# Altium PCB Optocoupler.PcbDoc
Units mil, origin at the board's own origin, x right, y up, seen from the top; angles counter-clockwise.
Board outline 1600.03 x 1010.03 mil, 2 copper layers (Top Layer, Bottom Layer); 8 components, 8 nets, 22 pads, 0 vias.
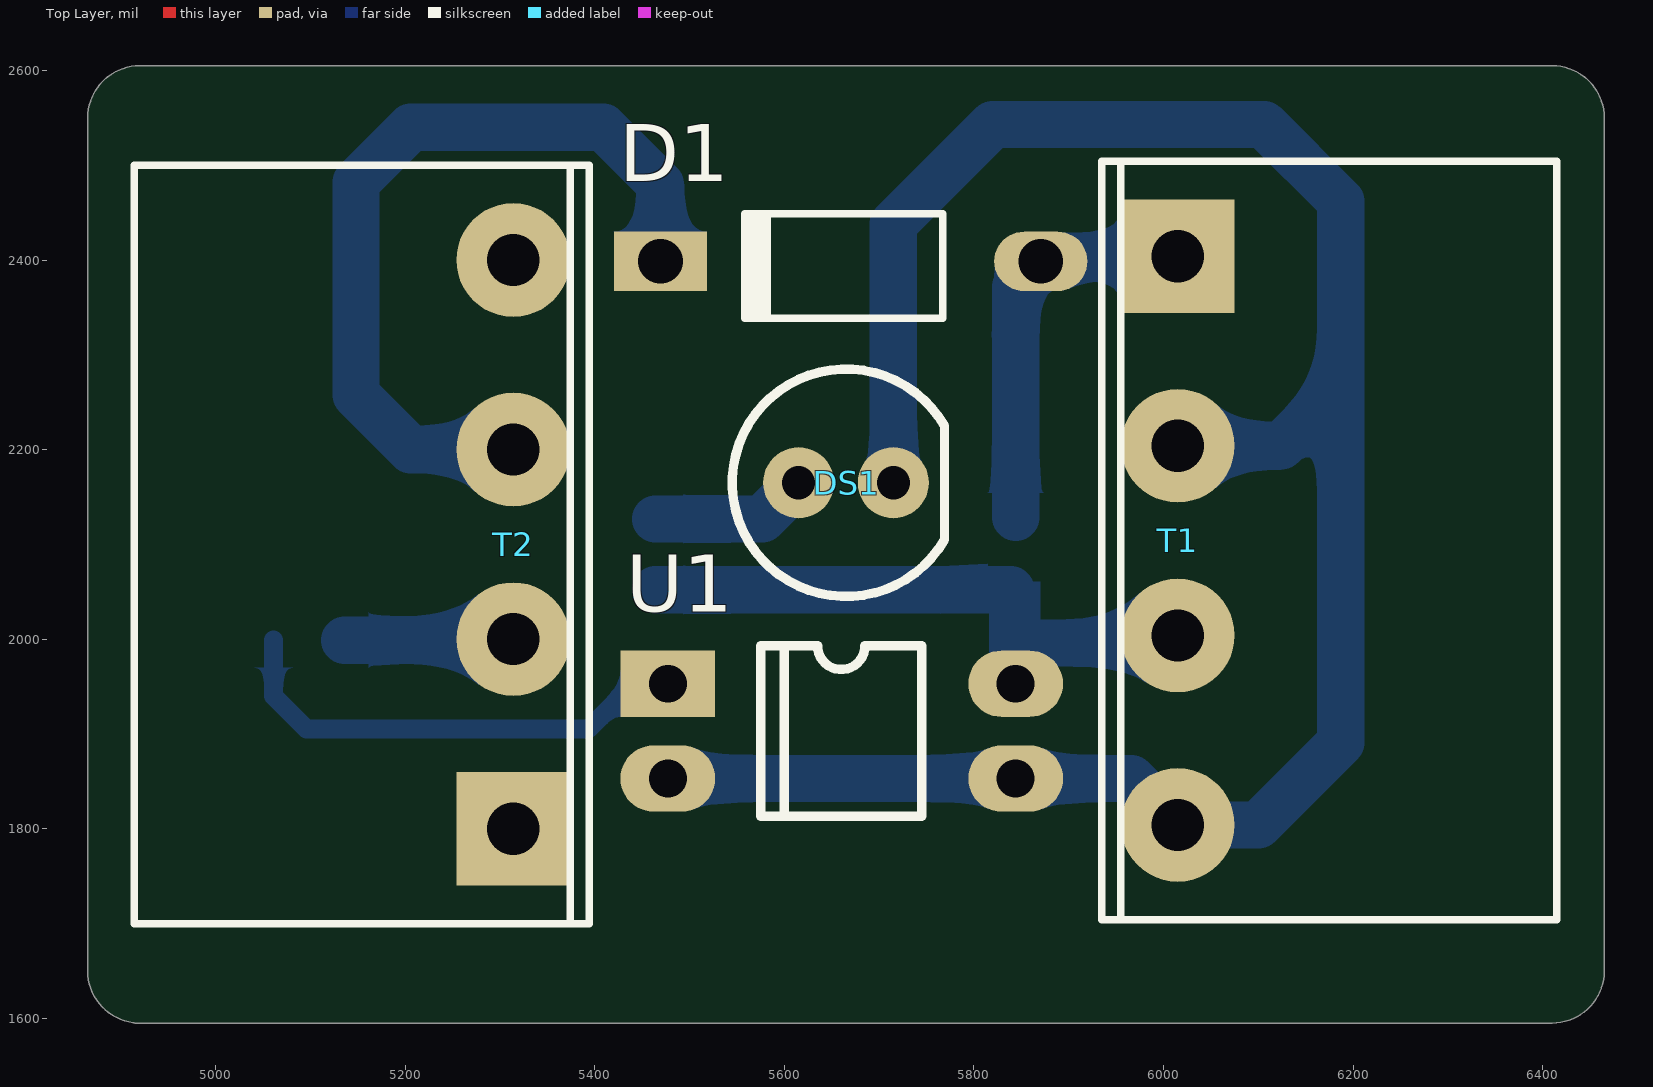
[diagram p0: Top Layer view]
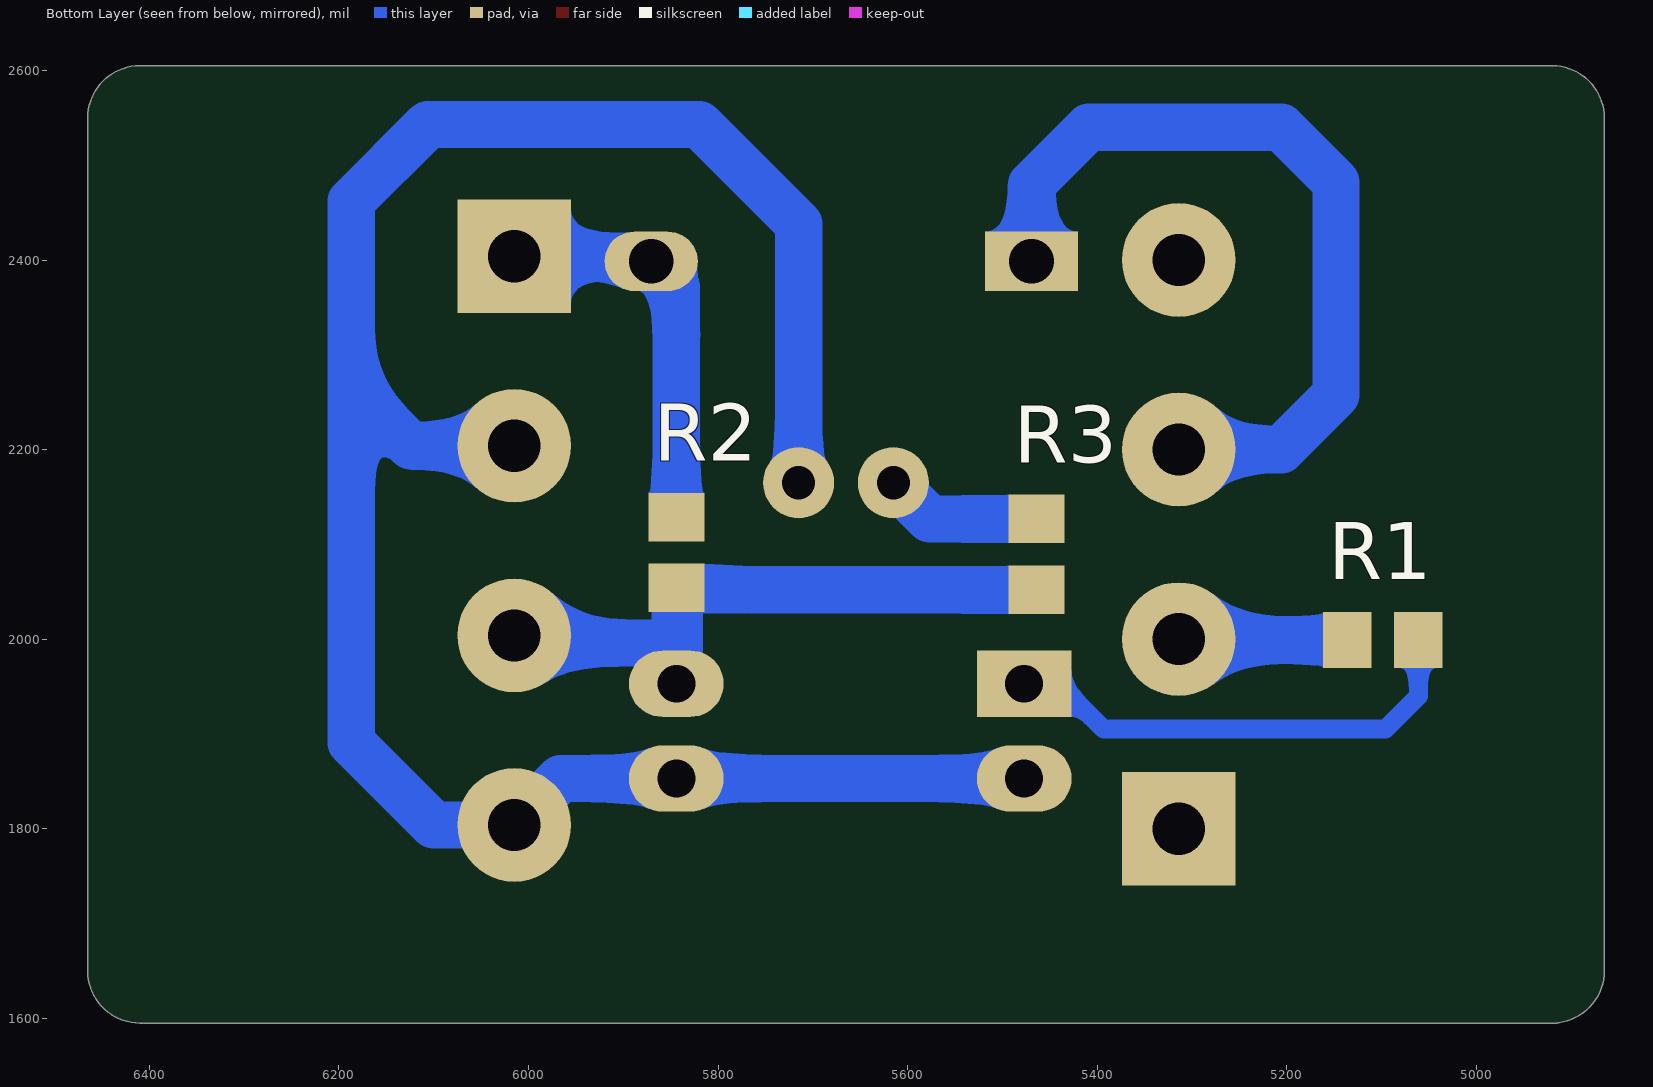
[diagram p1: Bottom Layer view, seen from below]
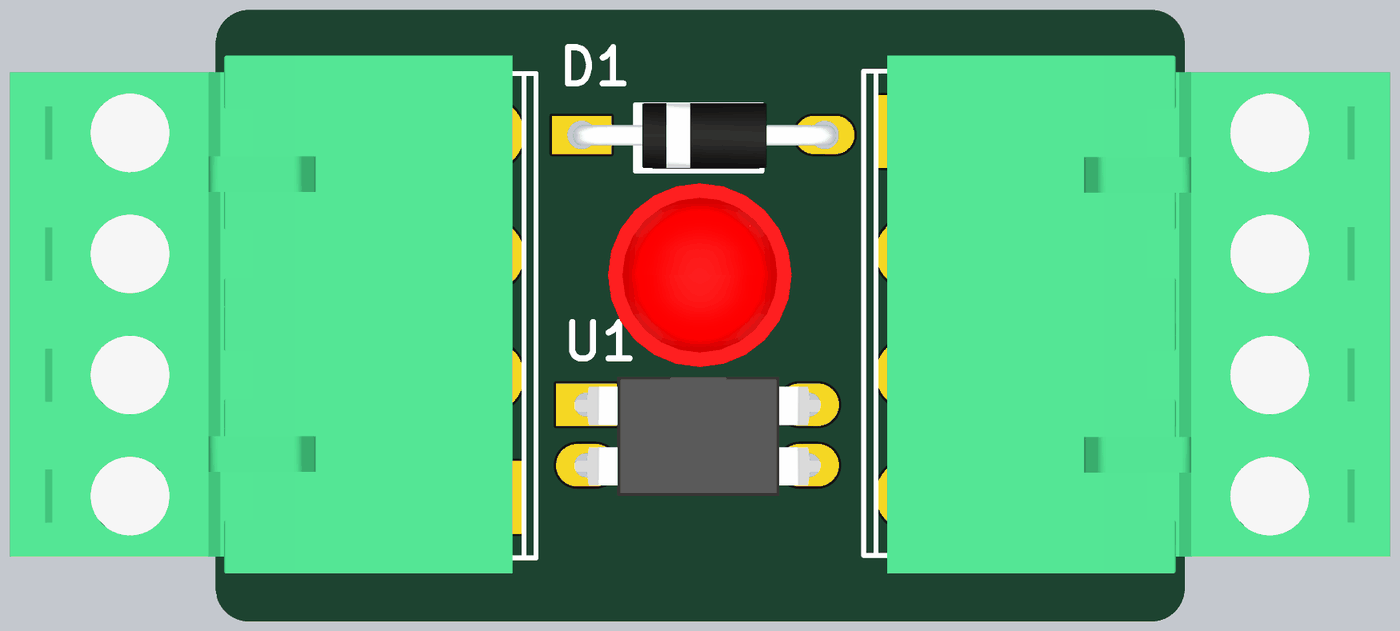
[diagram p2: 3D render of the assembled board from above, using the file's embedded part models]
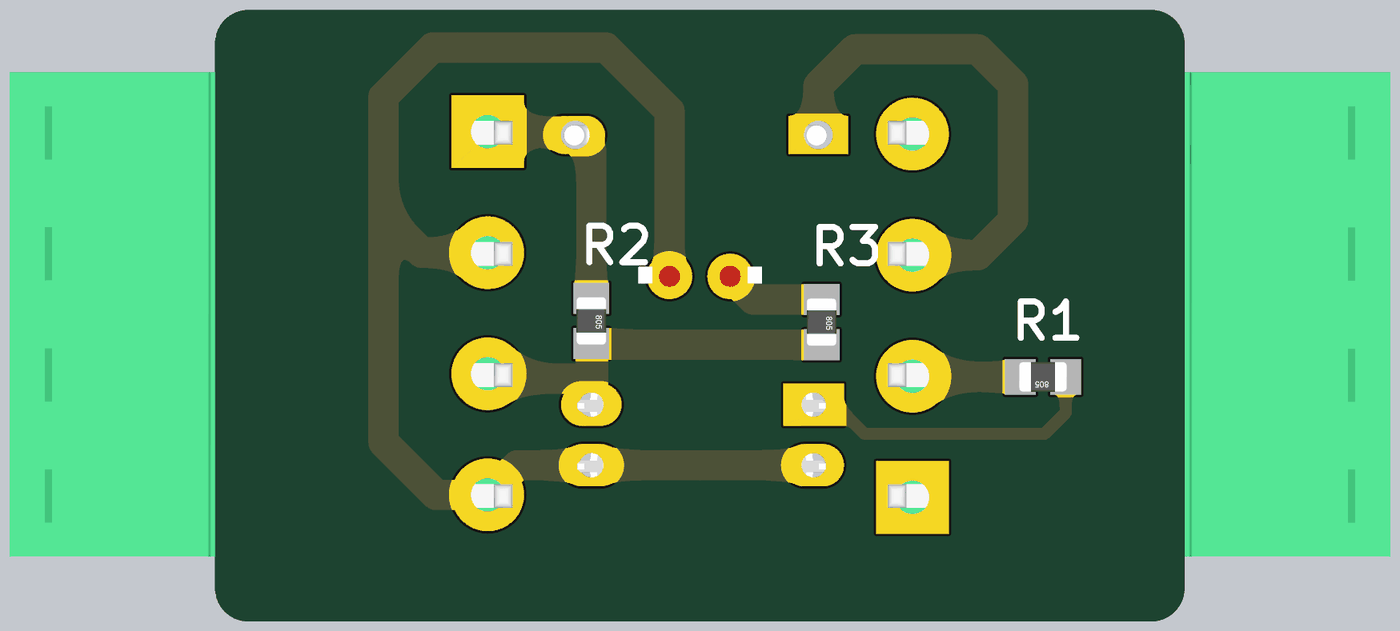
[diagram p3: 3D render of the assembled board from below, using the file's embedded part models]

## Layer stack, top to bottom
Top Solder: solder mask 0.4, Solder Resist, Dk 3.5
Top Layer: signal copper 1.4
Dielectric 1: dielectric 12.6, FR-4, Dk 4.8
Bottom Layer: signal copper 1.4
Bottom Solder: solder mask 0.4, Solder Resist, Dk 3.5

## Board outline
4864.98,1650 ccw(c4920,1650) 4912.9,1595.44 ccw(c4915,1600) 4915,1594.98 6410,1594.98 ccw(c6410,1650) 6465.02,1650 6465.02,2550 ccw(c6410,2550) 6410,2605.01 4920,2605.01 ccw(c4920,2550) 4864.98,2550

## Design rules (kind name [scope] priority, off if disabled: settings)
Clearance [All] p1: gap=10
PolygonConnect [All] p1: connectstyle=Relief reliefconductorwidth=10 reliefentries=4 polygonreliefangle="90 Angle" airgapwidth=10
RoutingVias [All] p1: holewidth=28 width=50 viastyle="Through Hole" minholewidth=28 minwidth=50 maxholewidth=28 maxwidth=50
SolderMaskExpansion [All] p1: expansion=4
Width [All] p1: maxlimit=100 minlimit=10 preferedwidth=10
30 further rules are at their usual default settings.

## Components (designator, comment, footprint, x,y, rotation, side; value= is the part's Value field where it differs from the comment)
D1 "1N4007" Diod 5871,2399 r180 top
DS1 "LED1" LED1 5615,2165 r0 top
R1 "Res 0805" R0805 5063,1999 r0 bottom
R2 "Res 0805" R0805 5844,2127 r270 bottom
R3 "Res 0805" R0805 5464,2125 r270 bottom
T1 "Phonix" Phonix-4 6015,2404 r270 top
T2 "Phonix" Phonix-4 5314,1800 r90 top
U1 "PC817" OptoCupler 5554,1899 r0 top

## Footprints (in the part's own frame and the unit in brackets; to place one, negate y for a bottom-side part, rotate by r counter-clockwise, add the part's x,y. Pads: shape width x height; smd on the part's side, far side on the other; paste and mask are expansions set on the pad)
Diod [mm]
  oval 2.5x1.6 hole 1.2: A(0.011,0.01)
  rect 2.5x1.6 hole 1.2: K(10.206,0.01)
  silkscreen extent 2.64,-1.28 8.04,1.54, body extent -0.46,-1.33 10.56,1.39, height 2.72
LED1 [mil]
  round 75 hole 35: A(0,0) K(100,0)
  silkscreen extent -70,-120 154,120, body extent -102,-150 201,154, height 456
OptoCupler [mil]
  rect 100x70 hole 40: 1(-77,54)
  oval 100x70 hole 40: 2(-77,-46) 3(290,-46) 4(290,54)
  silkscreen extent 21,-86 191,94, body extent -97,-96 313,100, height 175
Phonix-4 [mil]
  rect 120x120 hole 55: 1(0,0)
  round 120 hole 55: 2(200,0) 3(400,0) 4(600,0)
  silkscreen extent -100,-80 700,400, body extent -126,-41 730,789, height 615
R0805 [mm]
  rect 1.3x1.5 smd: 1(-0.046,0) 2(1.854,0)
  body extent -0.1,-0.62 1.9,0.63, height 0.78

## Part data
D1: library part Diode
T1 T2: library part Phonix-4
U1: library part Optoisolator(smd)

## Nets (pads, with @x,y where several pads share a name; then routed paths per layer and width w, separated by ;. In a path a pad name is that pad's centre, name@x,y a point inside that pad or via, vN(x,y) a via of type N, cw(c..) or ccw(c..) an arc to the next point about the centre after c; other vN are vias at no path point)
COM: D1.K T2.3 | length 865.4
  Bottom Layer w50: T2.3 5206,2200 5148,2258 5148,2482 5206,2540 5409,2540 5469.19,2479.81 D1.K
GND: DS1.K T1.2 T1.4 U1.2 U1.3 | length 2357.5
  Bottom Layer w50: U1.2 U1.3 5966,1853 T1.4 6100,1804 6187,1891 6187,2267 ; DS1.K 5715,2438 5820,2543 6106,2543 6187,2462 6187,2267 ; T1.2 6124,2204 6187,2267
NC: T2.4
NetDS1_A: DS1.A R3.1 | length 166.8
  Bottom Layer w50: R3.1 5576.8,2126.8 DS1.A
NetR1_1: R1.1 U1.1 | length 517.8
  Bottom Layer w20: R1.1 5061.2,1939.8 5096,1905 5393,1905 5441,1953 U1.1
  Bottom Layer w50: U1.1@5471,1959 U1.1
NO: R1.2 T2.2 | length 178.4
  Bottom Layer w50: R1.2 5313,1999 T2.2
SN1: R2.2 R3.2 T1.3 U1.4 | length 549.3
  Bottom Layer w50: R3.2 R2.2@5839,2052 ; 5844,1996 6007,1996 T1.3
VDD: D1.A R2.1 T1.1 | length 427.5
  Bottom Layer w50: R2.1 5844,2372 5876,2404 T1.1
pads on no net: T2.1

## Other copper
Bottom Layer:
  rectangle net SN1: 5816,1931 5870,2061

## Silkscreen, mask and mechanical layers (free items; w line width, h text height)
Mechanical 1:
  lines w10: 4915,1600 6410,1600 ccw(c6410,1650) 6460,1650 6460,1730 6460,2550 ccw(c6410,2550) 6410,2600 4920,2600 ccw(c4920,2550) 4870,2550 4870,2420 4870,1650 ccw(c4920,1650) 4920,1600